# Altium PCB RemoteControlPowerBoard.PcbDoc
Units mil, origin at the board's own origin, x right, y up, seen from the top; angles counter-clockwise.
Board outline 1800 x 1050 mil, 2 copper layers (Top Layer, Bottom Layer); 26 components, 18 nets, 78 pads, 26 vias.
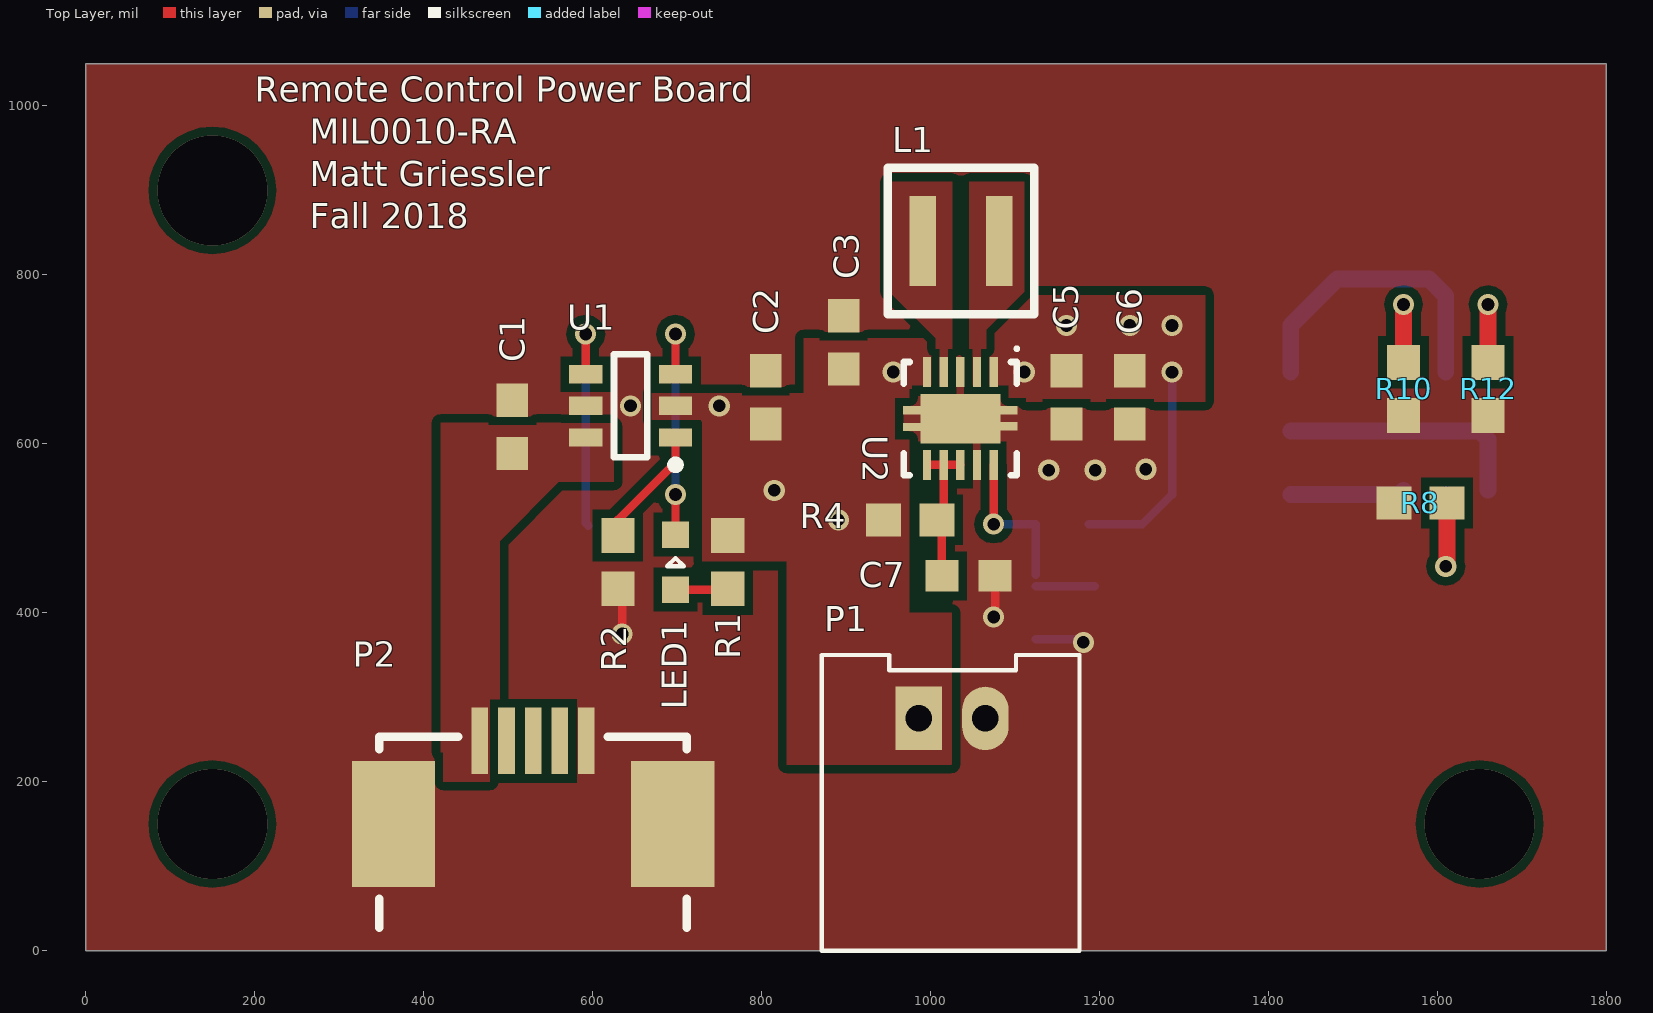
[diagram p0: Top Layer view]
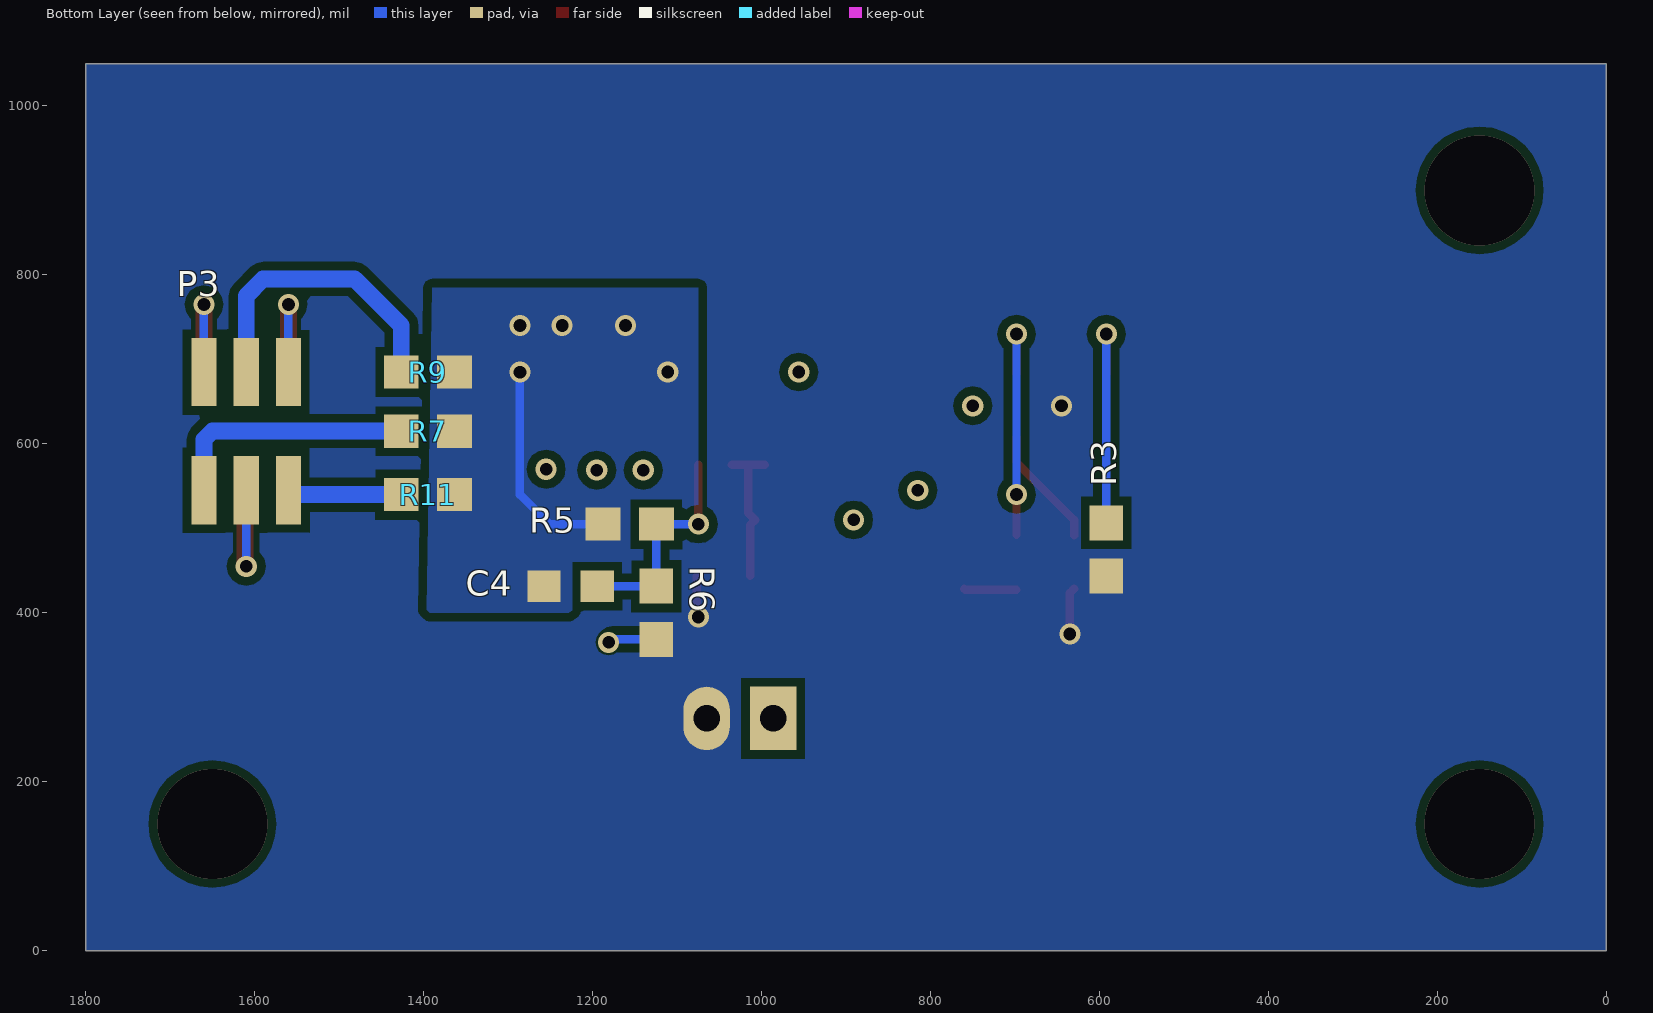
[diagram p1: Bottom Layer view, seen from below]

## Layer stack, top to bottom
Top Solder: solder mask 0.4, Solder Resist, Dk 3.5
Top Layer: signal copper 1.4
Dielectric 1: dielectric 12.6, FR-4, Dk 4.8
Bottom Layer: signal copper 1.4
Bottom Solder: solder mask 0.4, Solder Resist, Dk 3.5

## Board outline
0,0 1800,0 1800,1050 0,1050

## Design rules (kind name [scope] priority, off if disabled: settings)
Clearance [All] p1: gap=10 ignorepadtopadclearanceinfootprint=FALSE except(0: Arc-Hole Track-Hole SMDPad-Hole THPad-Hole Via-Hole Fill-Hole Poly-Hole Region-Hole Text-Hole; 5: Track-Track Track-SMDPad SMDPad-SMDPad; 7: Track-Via)
HoleSize [All] p1: absolutevalues=TRUE maxlimit=150 minlimit=10 maxpercent=80.000 minpercent=20.000
MinimumAnnularRing [All] p1: minimumring=5
MinimumSolderMaskSliver [All] p1: minsoldermaskwidth=1
PolygonConnect [All] p1: connectstyle=Direct reliefconductorwidth=10 reliefentries=4 polygonreliefangle="90 Angle" airgapwidth=10
RoutingVias [All] p1: holewidth=10 width=22 viastyle="Through Hole" minholewidth=10 minwidth=22 maxholewidth=100 maxwidth=150
SilkToSolderMaskClearance [IsPad] p1: minsilkscreentomaskgap=5 clearancetoexposedcopper=TRUE
SolderMaskExpansion [All] p1: expansion=4
Width [All] p1: maxlimit=150 minlimit=8 preferedwidth=10
27 further rules are at their usual default settings.

## Components (designator, comment, footprint, x,y, rotation, side; value= is the part's Value field where it differs from the comment)
C1 "Cap" CAPC0603 505,620 r90 top value=1uF
C2 "Cap" CAPC0603 805,655 r90 top value=1uF
C3 "Cap" CAPC0603 897.21,720 r90 top value=10uF
C4 "Cap" CAPC0603 1225.98,431.5 r180 bottom
C5 "Cap" CAPC0603 1160.98,655 r270 top value=10uF
C6 "Cap" CAPC0603 1235.98,655 r270 top value=10uF
C7 "Cap" CAPC0603 1045,443.78 r0 top value=100nF
L1 "LQH3NPZ2R2MMEL" LQH3NPZ2R2MMEL 1035.98,840 r0 top
LED1 "LED" LED0603 698.15,460 r90 top
P1 "2-pin Horz Sherlock" MOLEX-HDR-1X2-SHERLOCK-HORZ 986.26,275 r180 top
P2 "UX60SC-MB-5ST" UX60SC-MB-5ST 529.65,248.43 r0 top
P3 "Amphenol 20021321-00006C4LF" "Amphenol FCI 20021321-00006C4LF - duplicate" 1610,615 r90 bottom
R1 "Res" RES0603 760,460 r270 top value=1.5k
R2 "Res" RES0603 630,460 r270 top value=10k
R3 "Res" RES0603 591.85,475 r270 bottom value=1k
R4 "Res" RES0603 975.98,510 r0 top value=100
R5 "Res" RES0603 1155.98,505 r180 bottom
R6 "Res" RES0603 1124.49,400 r270 bottom
R7 "Res" RES0603 1395,615 r0 bottom value=0
R8 "Res" RES0603 1580,530 r0 top value=0
R9 "Res" RES0603 1395,685 r0 bottom value=0
R10 "Res" RES0603 1560,665 r90 top value=0
R11 "Res" RES0603 1395,540 r0 bottom value=0
R12 "Res" RES0603 1660,665 r90 top value=0
U1 "BQ21040" BQ21040DBVT 645,645 r180 top
U2 "TPS63000DRCR" TPS63000DRCR 1035.35,629.92 r270 top

## Footprints (in the part's own frame and the unit in brackets; to place one, negate y for a bottom-side part, rotate by r counter-clockwise, add the part's x,y. Pads: shape width x height; smd on the part's side, far side on the other; paste and mask are expansions set on the pad)
"Amphenol FCI 20021321-00006C4LF - duplicate" [mm] "6 Position Receptacle Connector"
  rect 2.05x0.76 smd: 1(-1.775,1.27) 2(-1.775,0) 3(-1.775,-1.27) 4(1.775,1.27) 5(1.775,0) 6(1.775,-1.27)
  body extent -2.3,-2.11 2.2,2.16, height 4.51
BQ21040DBVT [mm] "IC BAT CHG LI-ION 1 CELL SOT23-6"
  rect 1x0.55 smd: 1(-1.35,0.95) 2(-1.35,0) 3(-1.35,-0.95) 4(1.35,-0.95) 5(1.35,0) 6(1.35,0.95)
  silkscreen extent -1.48,-1.55 0.5,1.9, body extent -0.87,-1.52 0.87,1.53, height 1.45
CAPC0603 [mm] "Chip Capacitor, 2-Leads, Body 1.60x0.80mm, IPC Medium Density"
  rect 1x0.95 smd: 1(-0.8,0) 2(0.8,0)
  body extent -0.88,-0.48 0.87,0.48, height 0.8
LED0603 [mm] "Chip LED, 2-Leads, Body 1.60x0.80mm, IPC Medium Density"
  rect 0.8x0.8 smd: A(-0.825,0) C(0.825,0)
  silkscreen extent -0.13,-0.25 0.12,0.25, body extent -0.88,-0.48 0.87,0.47, height 0.8
LQH3NPZ2R2MMEL [mm] "FIXED IND 2.2UH 2.1A 78 MOHM"
  rect 0.8x2.7 smd: 1(-1.15,0) 2(1.15,0)
  silkscreen extent -2.2,-2.2 2.2,2.2
MOLEX-HDR-1X2-SHERLOCK-HORZ [mm]
  rect 1.397x1.905 hole 0.8: 1(0,0)
  oval 1.397x1.905 hole 0.8: 2(-2,0)
  silkscreen extent -4.83,-1.91 2.92,6.98, body extent -4.83,-1.91 2.87,8.59, height 5.54
RES0603 [mm] "Chip Resistor, 2-Leads, Body 1.60x0.80mm, IPC Medium Density"
  rect 1.05x1 smd: 1(-0.8,0) 2(0.8,0)
  body extent -0.88,-0.48 0.87,0.47, height 0.8
TPS63000DRCR [mm] "IC REG BUCK BOOST ADJ 1.6A 10SON"
  rect 0.9x0.25 smd: 1(-1.395,1) 2(-1.395,0.5) 3(-1.395,0) 4(-1.395,-0.5) 5(-1.395,-1) 6(1.395,-1) 7(1.395,-0.5) 8(1.395,0) 9(1.395,0.5) 10(1.395,1)
  rect 0.25x0.55 smd: 3(-0.254,1.448) 3(-0.254,-1.448) 3(0.229,1.448) 3(0.254,-1.448)
  rect 1.49x2.4 smd: 3(0,0)
  silkscreen extent -2.15,-1.7 1.7,1.75, body extent -1.55,-1.55 1.55,1.55, height 1
UX60SC-MB-5ST [mm] "USB Mini-B Recepticle"
  rect 0.5x2 smd: 1(-1.6,0) 2(-0.8,0) 3(0,0) 4(0.8,0) 5(1.6,0)
  rect 2.5x3.8 smd: SHD(-4.2,-2.5) SHD(4.2,-2.5)
  silkscreen extent -4.62,-5.63 4.62,0.13, body extent -4.9,-6.61 4.9,0.39, height 3.95

## Part data
C7: Supplier Part Number 1=1276-1000-1-ND, Supplier 1=Digi-Key
L1: Inductance=2.2uH, Manufacturer 1="Murata Electronics North America", Supplier Part Number 1=490-15973-1-ND, Manufacturer Part Number 1=LQH3NPZ2R2MMEL, Supplier 1=Digi-Key
LED1: Color=Red, Supplier Part Number 1=754-1122-1-ND, Supplier 1=Digi-Key
P1: library part MOLEX-HDR-1x2-SHERLOCK_RA, "Header, Molex, 2mm Pitch Sherlock Header, Single Row, Horizontal, 2 Circuits, Length 3.3mm,  0353630260", Manufacturer="Molex Inc", Manufacturer Part Number=0353630260, Supplier Part Number 1=WM18931-ND, Supplier 1=Digi-Key
P2: "USB Mini B Metal Shield SMT", Supplier Part Number 1=H11671CT-ND, Supplier 1=Digi-Key
P3: library part "Amphenol FCI 20021321-00006C4LF", "6 Position Receptacle Connector 0.050\" (1.27mm) Surface Mount Gold", Manufacturer 1="Amphenol FCI", Manufacturer Part Number 1=20021321-00006C4LF, Supplier Part Number 1=609-3704-1-ND, ComponentLink1Description=Website, Supplier 1=Digi-Key
R2: Supplier Part Number 1=RMCF0603JT10K0CT-ND, Supplier 1=Digi-Key
U1: "IC BAT CHG LI-ION 1 CELL SOT23-6", Manufacturer 1="Texas Instruments", Supplier Part Number 1=296-44196-1-ND, ComponentLink1Description=Datasheet, ComponentLink1URL=http://www.ti.com/lit/ds/symlink/bq21040.pdf, ComponentLink2Description=Website, ComponentLink2URL=http://www.ti.com/product/BQ21040/description, Manufacturer Part Number 1=BQ21040, Supplier 1=Digi-Key
U2: "Buck-Boost Switching Regulator IC Positive Adjustable 1.2V 1 Output 1.6A (Switch) 10-VFDFN Exposed Pad", Manufacturer 1="Texas Instruments", Supplier Part Number 1=296-19641-1-ND, ComponentLink1Description=Datasheet, ComponentLink1URL=http://www.ti.com/lit/ds/symlink/tps63002.pdf, ComponentLink2Description=Website, ComponentLink2URL=http://www.ti.com/product/TPS63002/description, Manufacturer Part Number 1=TPS63000DRCR, Supplier 1=Digi-Key
C1 C2 C3 C4 C5 C6 R1 R3 R4 R5 R6 R7 R8 R9 R10 R11 R12: Supplier 1=Digi-Key

## Via types
v1: diameter 25, hole 15, Top Layer to Bottom Layer, tented both sides, 23 vias
v2: diameter 130, hole 130, Top Layer to Bottom Layer, tented both sides, 3 vias

## Nets (pads, with @x,y where several pads share a name; then routed paths per layer and width w, separated by ;. In a path a pad name is that pad's centre, name@x,y a point inside that pad or via, vN(x,y) a via of type N, cw(c..) or ccw(c..) an arc to the next point about the centre after c; other vN are vias at no path point)
3V3: C4.1 C5.1 C6.1 R5.1 R7.1 R9.1 R11.1 U2.1 | length 257.8
  Bottom Layer w10: R5.1 1250.98,505 1285.98,540 v1(1285.98,684.84)
  other v1: 1110.98,685 1160.98,740 1235.98,740 1285.98,740
5V: C1.1 P2.1 U1.6
GND: C1.2 C2.2 C3.2 C5.2 C6.2 C7.2 P1.2 P2.5 P2.SHD R2.2 R3.2 R6.2 R8.1 R10.1 R12.1 U1.5 U2.3 U2.9 | length 163
  Top Layer w10: R2.2 635,423.5 v1(635,375) ; v1(1074.72,395) 1076.5,396.77 C7.2
  Bottom Layer w10: R6.2 1177.48,368.5 v1(1180.98,365)
  other v1: 1140,568.86 1195,568.86 1255,570 645,645
NetC4_2: C4.2 R5.2 R6.1 U2.10 | length 249.8
  Top Layer w10: v1(1074.72,505) U2.10
  Bottom Layer w10: v1(1074.72,505) R5.2 R6.1@1124.49,445 ; R6.1 C4.2
NetC7_1: C7.1 R4.2 U2.6 U2.7 U2.8 | length 176.5
  Top Layer w10: U2.6 U2.7 ; C7.1 1013.5,503.98 R4.2 1015.67,518.19 U2.7 ; U2.8 U2.7
NetL1_1: L1.1 U2.4
NetL1_2: L1.2 U2.2
NetLED1_A: LED1.A R1.2 | length 62.3
  Top Layer w10: LED1.A 759.02,427.52 R1.2
NetLED1_C: LED1.C U1.3 | length 285.1
  Top Layer w10: LED1.C v1(698.15,540) ; U1.3 v1(698.15,730)
  Bottom Layer w10: v1(698.15,540) v1(698.15,730)
NetP3_1: P3.1 R7.2 | length 297.5
  Bottom Layer w20: R7.2 1650,615 1660,605 P3.1
NetP3_2: P3.2 R8.2 | length 165.7
  Top Layer w20: v1(1610,455) 1611.5,456.5 R8.2
  Bottom Layer w10: v1(1610,455) P3.2
NetP3_3: P3.3 R11.2 | length 135.6
  Bottom Layer w20: R11.2 1554.88,540 P3.3
NetP3_4: P3.4 R12.2 | length 148.6
  Top Layer w20: R12.2 v1(1660,765)
  Bottom Layer w10: P3.4 v1(1660,765)
NetP3_5: P3.5 R9.2 | length 359.7
  Bottom Layer w20: R9.2 1426.5,740 1481.5,795 1590,795 1610,775 P3.5
NetP3_6: P3.6 R10.2 | length 148.6
  Top Layer w20: R10.2 v1(1560,765)
  Bottom Layer w10: P3.6 v1(1560,765)
NetR2_1: R2.1 U1.1 | length 144.3
  Top Layer w10: R2.1 630,510 698.15,578.15 698.15,581.85 U1.1
NetR3_1: R3.1 U1.4 | length 275.9
  Top Layer w10: U1.4 v1(591.85,730)
  Bottom Layer w10: v1(591.85,730) 591.85,506.14 R3.1@595,502.99
VBAT: C2.1 C3.1 P1.1 R1.1 R4.1 U1.2 U2.5
  other v1: 890.98,510 815,545 750,645 955.98,685
pads on no net: P2.2 P2.3 P2.4
copper on no net:
  other v2: 150,150 1650,150 150,900

## Polygon pours and split planes (outlines as drawn)
3V3 on Top Layer "Top Layer-3V3" (solid, pour order 14): 1065.98,665 1065.68,664.7 1065.68,650 1325,650 1325,776.1 1065.98,776.1
GND on Top Layer "GND_L01_P016" (solid, pour order 16): 0,1050 0,0 1800,0 1800,1050
VBAT on Top Layer "Top Layer-No Net 1" (solid, pour order 8): 670,660 670,624.17 729.17,624.17 730,625 730,460.83 830,460.83 830,220 1025.98,220 1025,220.98 1025,400 975,400 975,665 1005.98,665 1005.98,725 850,725 850,660
NetL1_2 on Top Layer "Top Layer-No Net 2" (solid, pour order 6): 1110.98,910 1110.98,780 1065.98,735 1065.98,665 1045.98,665 1045.98,910
NetL1_1 on Top Layer "Top Layer-No Net 3" (solid, pour order 4): 950.98,910 950.98,780 1005.98,725 1005.98,665 1025.98,665 1025.98,910
5V on Top Layer "Top Layer-No Net 4" (solid, pour order 0): 420,200 490,200 490,485 560,555 625,555 625,625 420,625
GND on Bottom Layer "Bottom Layer-No Net" (solid, pour order 12): 0,1050 1800,1050 1800,0 0,0
3V3 on Bottom Layer "Bottom Layer-No Net 1" (solid, pour order 10): 1075,785 1075,400 1396.31,400 1390,785

## Silkscreen, mask and mechanical layers (free items; w line width, h text height)
Top Overlay:
  text "Remote Control Power Board" at 200,1005 h30
  text "MIL0010-RA" at 265,955 h30
  text "Matt Griessler" at 265,905 h30
  text "Fall 2018" at 265,855 h30
BO:
  the board outline again, w10